# EAGLE board pulseoxrecv (EAGLE 6.5.0)
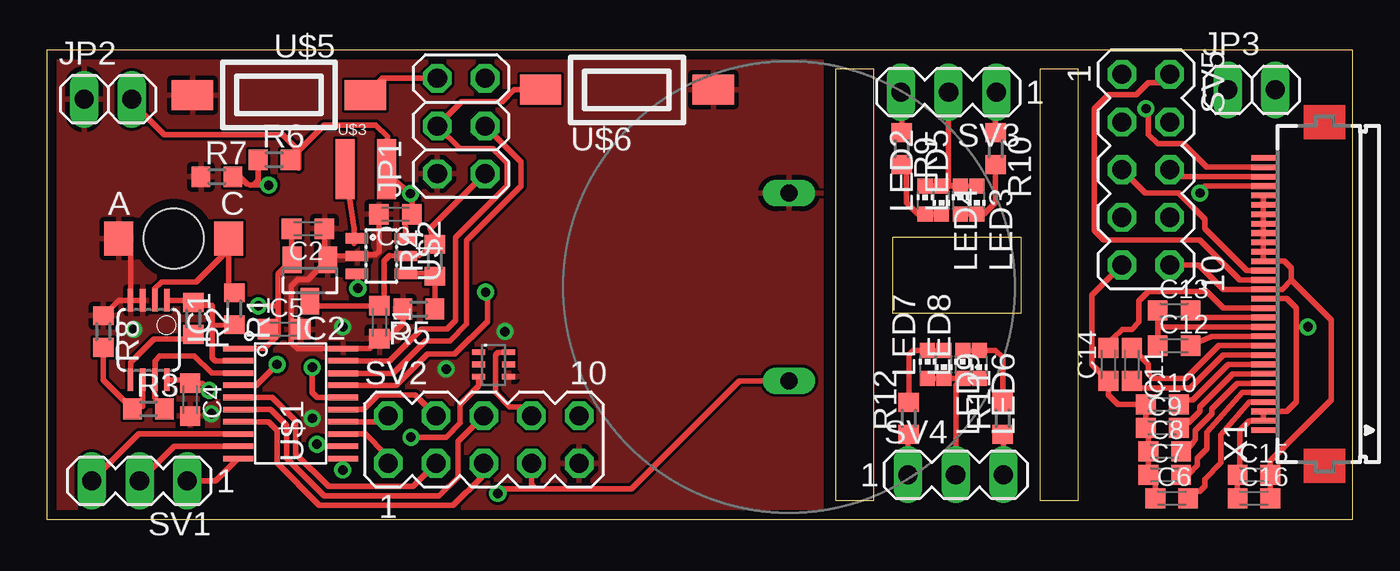
[diagram p0: board, top side]
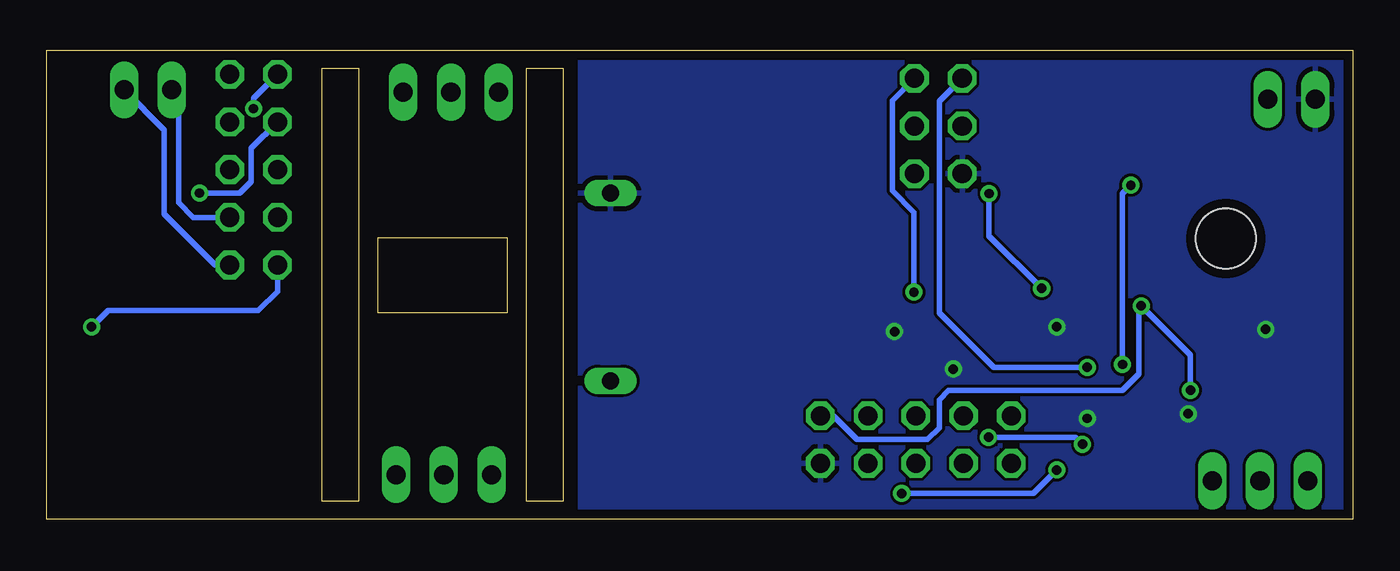
[diagram p1: board, bottom side, seen from below]

Size 69.5 x 25 mm. Coordinates in mm from the lower left corner, seen from the top.
Outline: 0,0 69.5,0 69.5,25 0,25 0,0
Outline: 42,1 42,24 44,24 44,1 42,1
Outline: 45,15 45,11 51.88,11 51.88,15 45,15
Outline: 52.88,24 54.88,24 54.88,1 52.88,1 52.88,24
Copper layers (1*16): Top 0.035mm / dielectric 1.5mm / Bottom 0.035mm
Design rules "default *": minimum track width 10mil, minimum drill 0.5mm, track to track 6mil, track to pad 6mil, pad to pad 6mil, via to via 6mil, smd to smd 1mil, copper to edge 0.5mm, drill to drill 8mil, minimum pad ring 10mil, minimum via ring 8mil, stop-mask expansion 2mil, vias tented up to drill 0mil, thermal gap 10mil
tRestrict: area 41.4,0.4 to 42,24.8
bRestrict: area 41.2,0.6 to 42.1,24.9

## Footprints (pad centres in the part's own frame; a part is rotated, then mirrored left to right if it is on the bottom)
C0603K = smd 1.05 x 1.08: 1 -0.875,0; 2 0.875,0
MSOP08 = smd 0.3 x 1.2: 1 -0.976,-2.113; 2 -0.326,-2.113; 3 0.324,-2.113; 4 0.974,-2.113; 5 0.974,2.112; 6 0.324,2.112; 7 -0.326,2.112; 8 -0.976,2.112
SOT23 = smd 1 x 1.4: 1 -0.95,-1.1; 2 0.95,-1.1; 3 0,1.1
2X03 = drill 1.016 octagon: 1 -2.54,-1.27; 2 -2.54,1.27; 3 0,-1.27; 4 0,1.27; 5 2.54,-1.27; 6 2.54,1.27
1X02 = drill 1.016 long: 1 -1.27,0; 2 1.27,0
R-PLCC2 = smd 1.55 x 1.8: A -2.925,0; C 2.925,0 | hole 3.2: 0,0
CHIP-LED0603 = smd 0.8 x 0.8: A 0,-0.75; C 0,0.75
R0603 = smd 1 x 1.1: 1 -0.85,0; 2 0.85,0
MA03-1 = drill 1.016 long: 1 -2.54,0; 2 0,0; 3 2.54,0
MA05-2 = drill 1.016 octagon: 1 -5.08,-1.27; 2 -5.08,1.27; 3 -2.54,-1.27; 4 -2.54,1.27; 5 0,-1.27; 6 0,1.27; 7 2.54,-1.27; 8 2.54,1.27; 9 5.08,-1.27; 10 5.08,1.27
TSSOP-20 = smd 1.6 x 0.3: P$1 -2.8,2.925; P$2 -2.8,2.275; P$3 -2.8,1.625; P$4 -2.8,0.975; P$5 -2.8,0.325; P$6 -2.8,-0.325; P$7 -2.8,-0.975; P$8 -2.8,-1.625; P$9 -2.8,-2.275; P$10 -2.8,-2.925; P$11 2.8,-2.925; P$12 2.8,-2.275; P$13 2.8,-1.625; P$14 2.8,-0.975; P$15 2.8,-0.325; P$16 2.8,0.325; P$17 2.8,0.975; P$18 2.8,1.6; P$19 2.8,2.275; P$20 2.8,2.925
SOT23-6L = smd 0.55 x 1.2: 1 -0.95,-1.3; 2 0,-1.3; 3 0.95,-1.3; 4 0.95,1.3; 5 0,1.3; 6 -0.95,1.3
WE-TPC = smd 3.2 x 1: P$1 0,-1.1; P$2 0,1.1
SOT363 = smd 0.7 x 0.3: P$1 -0.8,0.65; P$2 -0.8,0; P$3 -0.8,-0.65; P$4 0.8,-0.65; P$5 0.8,0; P$6 0.8,0.65
FSMSM = smd 2.2 x 1.6: P$1 -4.6,0; P$2 4.6,0
AT-2440-TWT-R = drill 0.9 long: P$1 -5,0; P$2 5,0
FH12-30S-0.5SH = smd 0.3 x 1.3: 1 -7.25,3.25; 2 -6.75,3.25; 3 -6.25,3.25; 4 -5.75,3.25; 5 -5.25,3.25; 6 -4.75,3.25; 7 -4.25,3.25; 8 -3.75,3.25; 9 -3.25,3.25; 10 -2.75,3.25; 11 -2.25,3.25; 12 -1.75,3.25; 13 -1.25,3.25; 14 -0.75,3.25; 15 -0.25,3.25; 16 0.25,3.25; 17 0.75,3.25; 18 1.25,3.25; 19 1.75,3.25; 20 2.25,3.25; 21 2.75,3.25; 22 3.25,3.25; 23 3.75,3.25; 24 4.25,3.25; 25 4.75,3.25; 26 5.25,3.25; 27 5.75,3.25; 28 6.25,3.25; 29 6.75,3.25; 30 7.25,3.25

## Placement (x,y rotation side)
C1  10u  [C0603K]  17.7,10.5 270 top
C2  4.7u  [C0603K]  13.9,15.47 180 top
C3  4.7u  [C0603K]  18.55,16.25 180 top
C4  0.1u  [C0603K]  7.62,6.38 270 top
C5  0.1u  [C0603K]  12.62,10.12 0 top
C6  1u  [C0603K]  59.88,1.12 0 top
C7  1u  [C0603K]  59.5,2.38 0 top
C8  1u  [C0603K]  59.5,3.62 0 top
C9  1u  [C0603K]  59.38,4.88 0 top
C10  1u  [C0603K]  59.38,6.12 0 top
C11  1u  [C0603K]  57.75,8.25 270 top
C12  1u  [C0603K]  60,9.25 0 top
C13  1u  [C0603K]  60,11.12 0 top
C14  1u  [C0603K]  56.5,8.25 90 top
C15  0.1u  [C0603K]  64.25,2.38 0 top
C16  10u  [C0603K]  64.25,1.12 0 top
IC1  LMV358MM  [MSOP08]  5.42,9.55 180 top
IC2  MCP1703CB  [SOT23]  14,12.72 180 top
JP1  [2X03]  22.05,20.95 90 top
JP2  [1X02]  3.25,22.38 0 top
JP3  [1X02]  64.12,22.88 0 top
LED1  QSB34ZR  [R-PLCC2]  6.74,14.95 0 top
LED2  [CHIP-LED0603]  46.75,17 0 top
LED3  [CHIP-LED0603]  49.5,17 180 top
LED4  [CHIP-LED0603]  47.62,17 180 top
LED5  [CHIP-LED0603]  48.62,17 0 top
LED6  [CHIP-LED0603]  49.62,8.25 180 top
LED7  [CHIP-LED0603]  46.88,8.25 0 top
LED8  [CHIP-LED0603]  48.75,8.25 0 top
LED9  [CHIP-LED0603]  47.75,8.25 180 top
R1  60k  [R0603]  9.97,11.22 270 top
R2  10k  [R0603]  7.79,10.7 270 top
R3  29k  [R0603]  5.4,5.88 0 top
R4  1000k  [R0603]  20.65,13.8 90 top
R5  600k  [R0603]  19.8,11.2 180 top
R6  1000k  [R0603]  12.1,19.15 0 top
R7  1000k  [R0603]  9.05,18.25 0 top
R8  1k  [R0603]  3,10 270 top
R9  1k  [R0603]  45.5,19.75 270 top
R10  1k  [R0603]  50.5,19.75 270 top
R11  1k  [R0603]  50.88,5.38 90 top
R12  1k  [R0603]  45.88,5.38 90 top
SV1  [MA03-1]  4.92,2.05 180 top
SV2  [MA05-2]  23.25,4.25 0 top
SV3  [MA03-1]  48,22.75 180 top
SV4  [MA03-1]  48.38,2.38 0 top
SV5  [MA05-2]  58.5,18.62 270 top
U$1  MSP430G2452IPW20  [TSSOP-20]  12.97,6.17 0 top
U$2  MCP1640SOT23-6  [SOT23-6L]  17.8,14.03 270 top
U$3  WE-TPC  [WE-TPC]  16.98,18.65 270 top
U$4  BSD816SN  [SOT363]  23.77,8.25 0 top
U$5  FSMSM  [FSMSM]  12.35,22.6 180 top
U$6  FSMSM  [FSMSM]  30.88,22.88 0 top
U$7  AT-2440-TWT-R  [AT-2440-TWT-R]  39.5,12.38 90 top
X1  FH12-30S-0.5SH  [FH12-30S-0.5SH]  68,12 90 top

## Library data of the parts
C1-C16 R1-R12 = rcl
IC1 IC2 = linear
JP1-JP3 = pinhead
LED1 U$1 U$3 U$7 = pulseoxparts
LED2-LED9 = led
SV1-SV5 = con-lstb; OC_FARNELL: unknown; OC_NEWARK: unknown
U$2 = motiondet
U$4-U$6 = untitled
X1 = con-hirose; MPN: FH12-30S-0.5SH(55); OC_FARNELL: 1324555; OC_NEWARK: 34M6176

## Nets
3V: C2.2 C4.1 C5.1 IC1.8 IC2.2 SV2.10 U$1.P$1
GND: C1.2 C2.1 C3.2 C4.2 C5.2 IC1.3 IC1.4 IC2.1 JP1.2 JP2.1 LED1.A R5.2 R7.1 R8.1 SV2.9 U$1.P$20 U$2.2 U$4.P$4 U$5.P$2 U$6.P$2 U$7.P$2
N$1: IC1.2 LED1.C R1.1
N$2: SV2.4 U$1.P$15
N$3: IC1.1 R1.2 R2.1 U$1.P$2
N$4: IC1.5 R2.2
N$5: IC1.6 R3.1 R8.2
N$6: IC1.7 R3.2 U$1.P$3
N$7: SV2.2 U$1.P$14
N$8: C1.1 IC2.3 JP1.1 R4.2 U$2.5
N$9: U$2.1 U$3.P$1
N$10: R4.1 R5.1 U$2.4
N$11: C3.1 JP2.2 R6.2 U$2.3 U$2.6 U$3.P$2
N$12: SV1.1 U$1.P$10
N$13: SV1.2 U$1.P$9
N$14: SV1.3 U$1.P$8
N$15: R6.1 R7.2 U$1.P$4
N$16: SV2.1 U$1.P$13
N$17: U$1.P$12 U$4.P$3
N$18: SV2.7 U$1.P$11 U$7.P$1
N$19: SV2.3 U$1.P$5
N$20: SV2.6 U$1.P$6
N$21: SV2.5 U$1.P$7
N$22: SV2.8 U$4.P$6
N$23: LED2.C LED3.A LED4.A LED5.C SV3.2
N$24: LED2.A LED4.C R9.2
N$25: LED3.C LED5.A R10.2
N$26: R9.1 SV3.3
N$27: R10.1 SV3.1
N$28: LED6.C LED7.A LED8.A LED9.C SV4.2
N$29: LED7.C LED9.A R12.2
N$30: LED6.A LED8.C R11.2
N$31: JP1.4 U$1.P$19 U$6.P$1
N$32: R11.1 SV4.3
N$33: R12.1 SV4.1
N$34: JP1.3 U$1.P$18
N$35: JP1.5 U$1.P$17
N$36: JP1.6 U$1.P$16 U$5.P$1
N$37: SV5.5 X1.18
N$38: C7.2 X1.5
N$39: C9.2 X1.7
N$40: C6.2 X1.4
N$41: C8.2 X1.6
N$42: C10.2 X1.8
N$43: C6.1 C7.1 C8.1 C9.1 C10.1 C14.1 C15.1 C16.1 SV5.9 X1.2 X1.3 X1.15
N$44: C11.2 X1.9
N$45: C11.1 X1.10
N$46: C12.2 X1.11
N$47: C13.2 X1.13
N$48: C12.1 C13.1 X1.12
N$49: C14.2 X1.14
N$50: C15.2 C16.2 JP3.2 SV5.10 X1.16 X1.19 X1.20 X1.21 X1.22 X1.23 X1.24 X1.25 X1.26
N$51: SV5.2 X1.17
N$52: SV5.1 X1.29
N$53: SV5.6 X1.28
N$54: SV5.3 X1.27
N$56: JP3.1 SV5.8

## Tracks (layer width: path | path; a pad name or v marks a point on that pad's centre or on a via)
3V  (via drill 0.5)
  Top 0.305: 13.03,13.85 C2.2 12.9,15.6 | 13.03,13.85 IC2.2 12.3,13.07 12.3,11.25 | 13.03,13.85 13.03,13.4 | 12.3,11.25 12.3,10.12 | 12.3,10.12 12.3,9.8 11.6,9.1 U$1.P$1 | IC1.8 7.69,7.44 C4.1 8.25,7.25 8.5,7 8.5,6.88 v8.62,6.88 | C5.1 12.3,10.12 | v11.25,11.38 12.18,11.38 12.3,11.25
  Bottom 0.305: v8.62,6.88 8.62,8.75 v11.25,11.38 11.38,11.25 11.38,7.75 12.25,6.88 21.5,6.88 22,6.38 22,4.88 22.62,4.25 26.38,4.25 27.64,5.52 SV2.10
GND  (via drill 0.5)
  Top 0.305: IC1.4 4.45,14.84 | IC1.3 IC1.4 | IC2.1 14.78,14 C2.1 15.07,15.18 | C3.2 17.68,14.28 17.5,14.1 16.8,14.1 U$2.2 15.18,14.05 IC2.1 | 13,10.12 13,9.4 13.3,9.1 U$1.P$20 17.17,9.1 C1.2 18.12,9.62 18.95,10.45 R5.2 | 13,10.12 13,12.43 13.35,12.78 13.9,12.78 IC2.1 | IC1.4 3.81,11.66 R8.1 | C5.2 13,10.12
  other vias: 8.75,5.62 4.62,10.12 15.75,10.25 21.25,8 24.38,10 14.12,5.38
  pour Top: -1.25,26.38 -1.25,-2 42.75,-2 42.75,27.12 42,27.12 42,27.25 -0.62,27.25
  pour Bottom: -2.38,27.25 -2.38,-4.25 45,-4.25 45,28.75 44.62,28.75 44.62,29 -1.88,29
N$1
  Top 0.305: IC1.2 5.75,12.3 6.1,12.65 7.95,12.65 9.45,14.15 9.7,14.15 9.7,14.55 9.67,13.58 9.67,12.53 R1.1
  Top 0.406: LED1.C 9.7,14.95 9.7,14.55
N$2
  Top 0.305: U$1.P$15 16.84,5.84 17.62,6.62 19.61,6.62 SV2.4
N$3
  Top 0.305: U$1.P$2 8.96,8.45 8.8,8.6 8.8,11.4 | R1.2 8.78,10.33 8.8,11.4 | 8.8,11.4 7.94,11.4 R2.1 7.68,11.66 IC1.1
N$4
  Top 0.305: IC1.5 4.45,8.35 5.7,9.6 7.54,9.6 R2.2
N$5
  Top 0.305: IC1.6 5.1,6.03 R3.1 3,7.43 R8.2
N$6
  Top 0.305: R3.2 5.75,6.48 IC1.7 5.75,8.45 6,8.7 7.85,8.7 8.76,7.79 U$1.P$3
N$7
  Top 0.305: U$1.P$14 17.84,5.2 SV2.2
N$8
  Top 0.305: 17.68,11.05 C1.1 | C1.1 17.95,11.28 17.95,13.75 18.25,14.05 U$2.5 19.8,14.05 R4.2 20.4,15.49 JP1.1 | C1.1 14.25,11.38 IC2.3
N$9
  Top 0.305: U$2.1 16.35,14.7 16.35,15.5 U$3.P$1
N$10
  Top 0.305: U$2.4 20.57,13.15 R4.1 R5.1
N$11  (via drill 0.5)
  Top 0.305: U$2.6 19.07,16.27 C3.1 19.43,17.02 v19.35,17.35 | v16.55,12.3 16.55,13.2 U$2.3 | 19.25,17.2 v19.35,17.35 | v19.35,17.35 17.75,18.7 U$3.P$2 18.12,18.7 18.12,20.38 17.5,21 14.75,21 13.4,19.65 | R6.2 13.4,18.7 13.4,19.65 | JP2.2 4.52,22.23 6.25,20.5 12.55,20.5 13.4,19.65
  Bottom 0.305: v19.35,17.35 19.35,15.1 v16.55,12.3
N$12
  Top 0.305: SV1.1 8.97,2.05 U$1.P$10
N$13
  Top 0.305: U$1.P$9 6.77,3.9 SV1.2
N$14
  Top 0.305: U$1.P$8 4.88,4.54 SV1.3
N$15  (via drill 0.5)
  Top 0.305: U$1.P$4 11.14,7.14 v12.25,8.25 | v11.8,17.8 11,17.8 | 11,17.8 10.85,17.8 10.65,17.85 10.25,18.25 R7.2 | R6.1 11.25,18.05 11,17.8
  Bottom 0.305: v12.25,8.25 12.25,17.35 v11.8,17.8
N$16
  Top 0.305: U$1.P$13 16.95,4.54 18,3.5 18,2.9 SV2.1
N$17  (via drill 0.5)
  Top 0.305: U$4.P$3 22.98,7.1 22,6.12 22,5.12 21.25,4.38 v19.38,4.38 | 14.5,4 v14.38,4 14.48,3.9 U$1.P$12
  Bottom 0.305: v19.38,4.38 14.75,4.38 v14.38,4
N$18  (via drill 0.5)
  Top 0.305: U$7.P$1 36.88,7.38 31.12,1.62 26,1.62 | 26,1.62 24.25,1.62 v24,1.38 | v15.75,2.62 15.75,3.23 U$1.P$11 | SV2.7 25.79,1.83 26,1.62
  Bottom 0.305: v24,1.38 17,1.38 v15.75,2.62
N$19
  Top 0.305: U$1.P$5 12,6.5 13.25,5.25 13.25,3.5 15,1.75 19.48,1.75 SV2.3
N$20
  Top 0.305: U$1.P$6 11.9,5.84 12.75,5 12.75,3.25 14.75,1.25 20.88,1.25 21.88,2.25 21.88,4.14 SV2.6
N$21
  Top 0.305: U$1.P$7 11.8,5.2 12.25,4.75 12.25,3 14.5,0.75 21.62,0.75 23.12,2.25 23.12,2.85 SV2.5
N$22
  Top 0.305: U$4.P$6 24.02,8.9 23.88,8.75 23.88,6.75 24.62,6 25.31,6 SV2.8
N$23
  Top 0.305: LED3.A LED5.C 48.12,17.75 | 48.12,17.75 LED4.A LED2.C | SV3.2 48,17.88 48.12,17.75
N$24
  Top 0.305: LED4.C LED2.A 46.38,16.25 45.75,16.88 45.75,18.65 R9.2
N$25
  Top 0.305: LED5.A LED3.C 49.88,16.25 50.5,16.88 R10.2
N$26
  Top 0.305: R9.1 45.5,22.71 SV3.3
N$27
  Top 0.305: R10.1 50.5,22.71 SV3.1
N$28
  Top 0.305: LED7.A LED9.C LED8.A | LED8.A LED6.C | SV4.2 48.38,7.12 LED8.A
N$29
  Top 0.305: LED9.A LED7.C 46.12,9 45.88,8.75 R12.2
N$30
  Top 0.305: LED8.C LED6.A 50.5,9 50.88,8.62 R11.2
N$31
  Top 0.305: U$1.P$19 18.25,8.45 19.95,10.15 21.3,10.15 21.75,10.6 21.75,15 24.5,17.75 24.5,19 23.75,19.75 21.98,19.75 JP1.4 22.08,22.25 24.25,22.25 24.88,22.88 U$6.P$1
N$32
  Top 0.305: SV4.3 50.91,4.49 R11.1
N$33
  Top 0.305: SV4.1 45.84,4.49 R12.1
N$34
  Top 0.305: U$1.P$18 18.42,7.77 20.15,9.5 21.45,9.5 22.35,10.4 22.35,14.85 25.25,17.75 25.25,19.02 JP1.3
N$35  (via drill 0.5)
  Top 0.305: U$1.P$17 18.59,7.14 20.25,8.8 21.7,8.8 23.45,10.55 23.45,12 v23.35,12.1
  Bottom 0.305: 23.4,12.1 v23.35,12.1 23.35,16.35 24.5,17.5 24.5,22.31 JP1.5
N$36  (via drill 0.5)
  Top 0.305: U$1.P$16 14.38,6.5 14.12,6.75 v14.12,8.1 | JP1.6 17.84,23.49 U$5.P$1
  Bottom 0.305: v14.12,8.1 19.1,8.1 22,11 22,22.27 JP1.6
N$37
  Top 0.305: X1.18 63.88,13.25 61.62,15.5 61.62,16 60.25,17.38 58.48,17.38 SV5.5
N$38
  Top 0.305: X1.5 63.62,6.75 61.75,4.62 61.75,3.75 61.25,3.25 61.25,2.88 60.75,2.38 C7.2
N$39
  Top 0.305: C9.2 60.62,5.12 60.75,5.12 61.38,5.75 61.38,6 63.12,7.75 X1.7
N$40
  Top 0.305: X1.4 64,6.25 62.5,4.5 62.5,3 61.62,2.12 61.62,1.75 61.38,1.5 61.12,1.5 C6.2
N$41
  Top 0.305: X1.6 63.38,7.25 62,5.88 62,5.62 61.12,4.75 61.12,4.25 60.88,3.88 60.62,3.88 C8.2
N$42
  Top 0.305: X1.8 62.88,8.25 61,6.38 60.5,6.38 C10.2
N$43  (via drill 0.5)
  Top 0.305: C6.1 59,2 C7.1 C8.1 58.62,4.75 C9.1 C10.1 57,6.12 56.5,6.62 C14.1 55.62,8.25 55.62,11.94 SV5.9 | 66.5,10.25 66.5,6.25 66,5.75 X1.3 X1.2 64,5.25 63.5,4.75 63.5,2.5 C15.1 C16.1 | 66.5,10.25 66.5,11.25 66,11.75 X1.15 | v67.12,10.25 66.5,10.25
  Bottom 0.305: SV5.9 57.23,12.14 58.25,11.12 66.25,11.12 v67.12,10.25
N$44
  Top 0.305: X1.9 62.62,8.75 60.88,7 58.12,7 C11.2
N$45
  Top 0.305: 57.62,9.25 C11.1 58.62,8.25 58.62,7.75 58.88,7.5 60.62,7.5 62.38,9.25 X1.10
N$46
  Top 0.305: X1.11 62,9.75 C12.2
N$47
  Top 0.305: X1.13 61.25,10.75 C13.2
N$48
  Top 0.305: X1.12 59.12,10.25 | 59.12,10.25 C12.1 | C13.1 59.12,10.25
N$49
  Top 0.305: X1.14 62.62,11.25 61.75,12.12 58.62,12.12 58.12,11.62 58.12,10.5 57.75,10.12 57.25,10.12 56.75,9.62 56.75,9.38 C14.2
N$50
  Top 0.305: 66.25,12.75 65.75,12.25 X1.16 62.62,12.25 61.33,13.54 SV5.10 | 66.25,12.75 66.25,13.38 65.88,13.75 X1.19 X1.20 X1.21 X1.22 X1.23 X1.24 X1.25 X1.26 | C16.2 C15.2 65.12,3.12 68.38,6.38 68.38,10.62 66.25,12.75
  Bottom 0.305: SV5.10 60.55,13.54 63.25,16.25 63.25,20.73 JP3.2
N$51
  Top 0.305: X1.17 63.5,12.75 61.38,14.88 56.25,14.88 55.75,15.38 55.75,21.88 56.5,22.62 58,22.62 58.62,23.25 59.31,23.25 SV5.2
N$52  (via drill 0.5)
  Top 0.305: X1.29 61.75,18.75 60.5,20 59.12,20 58.62,20.5 58.62,21.62 v58.5,21.88
  Bottom 0.305: v58.5,21.88 58.5,22.43 SV5.1
N$53
  Top 0.305: X1.28 60.15,18.25 SV5.6
N$54  (via drill 0.5)
  Top 0.305: X1.27 61.62,17.75 v61.38,17.38
  Bottom 0.305: v61.38,17.38 59.25,17.38 58.62,18 58.62,19.77 SV5.3
N$56
  Bottom 0.305: SV5.8 61.71,16.09 62.5,16.88 62.5,22.52 JP3.1